# Altium PCB PCB1.PcbDoc
Units mm, origin at the board's own origin, x right, y up, seen from the top; angles counter-clockwise.
Board outline 60 x 90 mm, 2 copper layers (Top Layer, Bottom Layer); 26 components, 19 nets, 71 pads, 0 vias.
Unrouted connection lines stored in the file: 49.
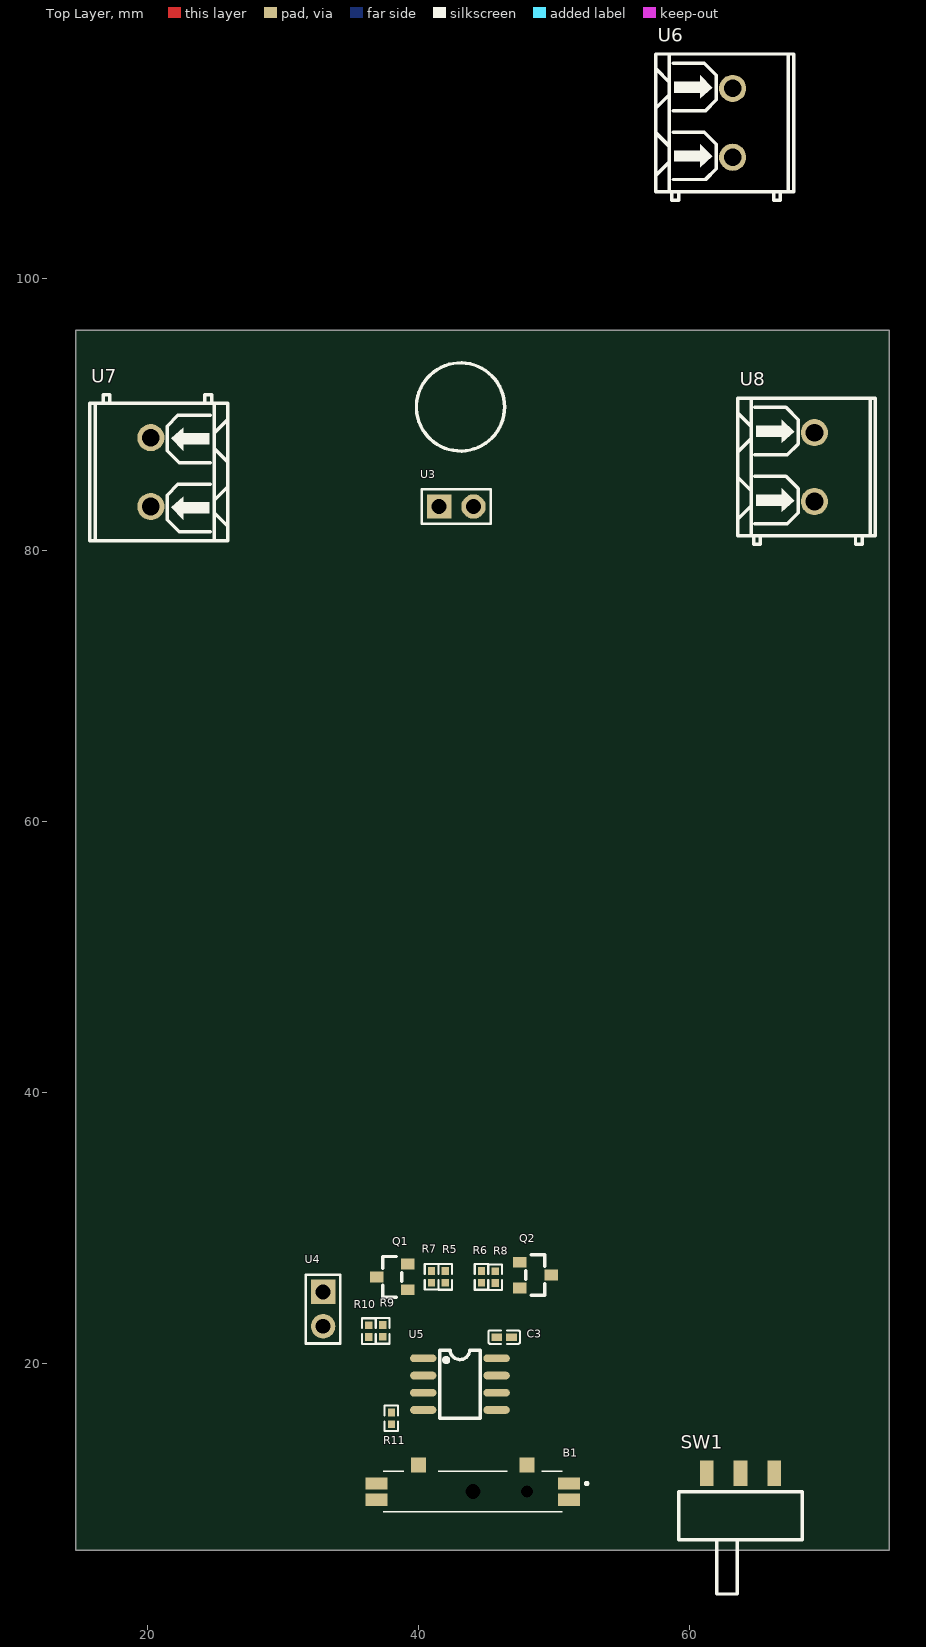
[diagram p0: Top Layer view]
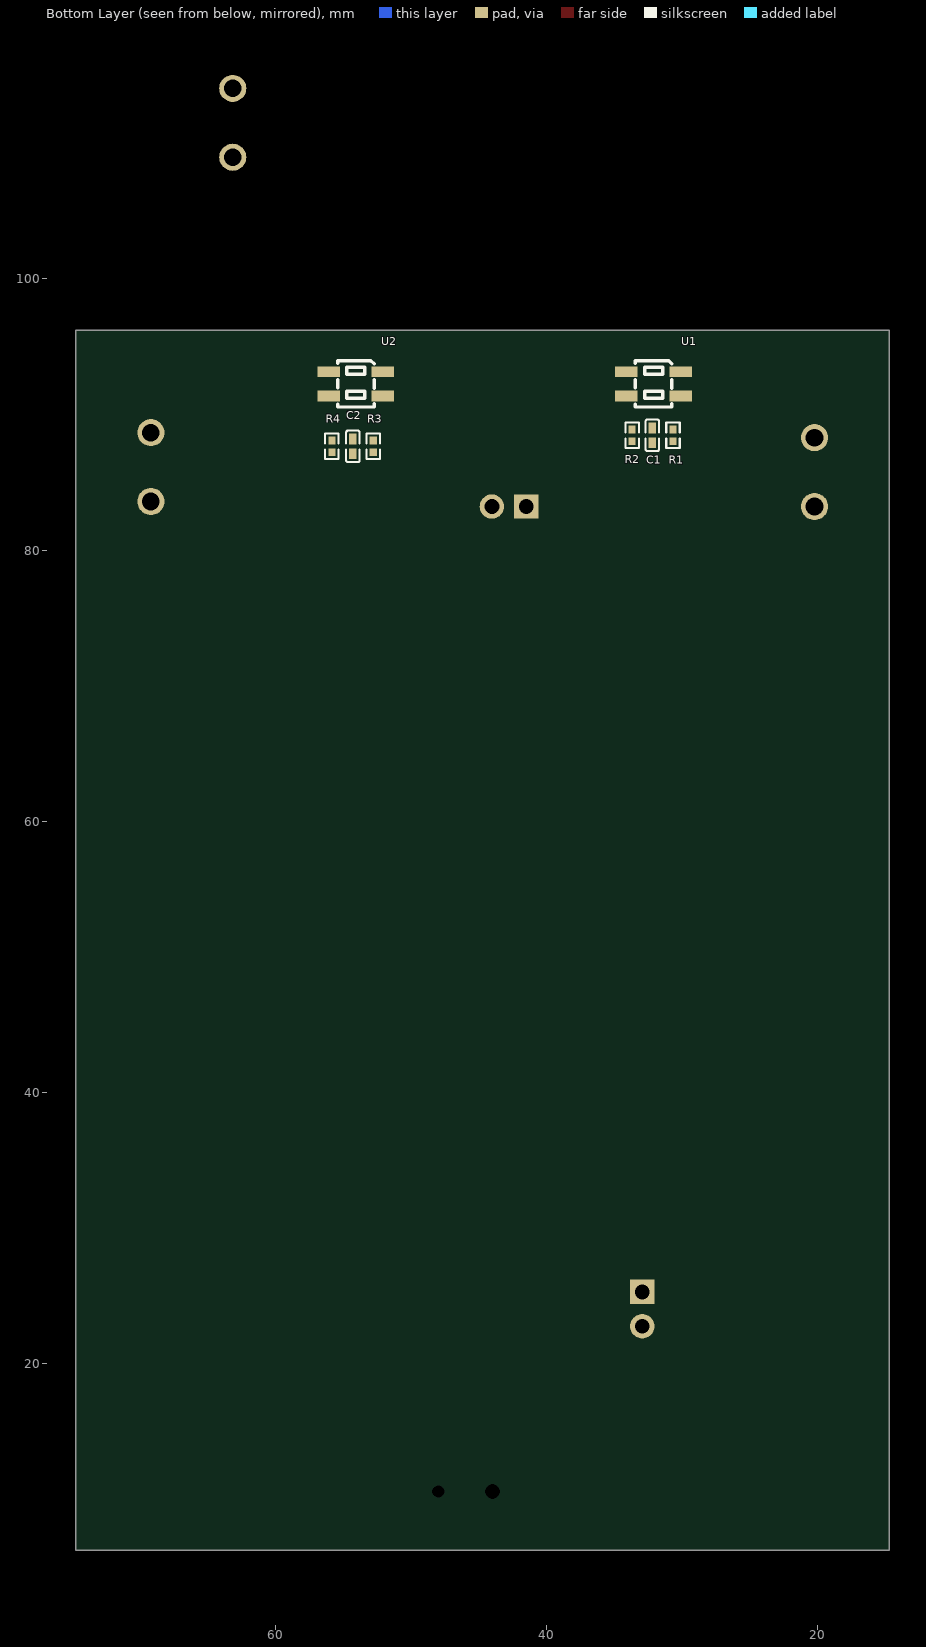
[diagram p1: Bottom Layer view, seen from below]

## Layer stack, top to bottom
Top Solder: solder mask 0.0102, Solder Resist, Dk 3.5
Top Layer: signal copper 0.0356
Dielectric 1: dielectric 0.32, FR-4, Dk 4.8
Bottom Layer: signal copper 0.0356
Bottom Solder: solder mask 0.0102, Solder Resist, Dk 3.5

## Board outline
14.732,6.223 14.732,96.223 74.732,96.223 74.732,6.223

## Design rules (kind name [scope] priority, off if disabled: settings)
Clearance [All] p1: gap=0.254 ignorepadtopadclearanceinfootprint=FALSE
PolygonConnect [All] p1: connectstyle=Relief reliefconductorwidth=0.254 reliefentries=4 polygonreliefangle="90 Angle" airgapwidth=0.254
RoutingVias [All] p1: holewidth=0.711 width=1.27 viastyle="Through Hole" minholewidth=0.711 minwidth=1.27 maxholewidth=0.711 maxwidth=1.27
SolderMaskExpansion [All] p1: expansion=0.102 istentingtop=FALSE
SupplyNets "Schematic Supply Nets_1" [InNet('GND')] p1: voltage=0.000
SupplyNets "Schematic Supply Nets" [InNet('VCC')] p2: voltage=0.000
Width [All] p1: maxlimit=0.254 minlimit=0.254 preferedwidth=0.254
30 further rules are at their usual default settings.

## Classes and differential pairs
component class Sensor: C1 C2 R1 R2 R3 R4 U1 U2
component class OpAmp: B1 C3 Q1 Q2 R5 R6 R7 R8 R9 R10 R11 SW1 U5 U6 U7 U8
component class FSM: U3 U4

## Components (designator, comment, footprint, x,y, rotation, side; value= is the part's Value field where it differs from the comment)
B1 "RS08U11AZ001" RS08U11AZ001 44.006,10.541 r180 top
C1 "10nF" C0402 32.216,88.462 r270 bottom
C2 "10nF" C0402 54.307,87.648 r270 bottom
C3 "100nF" C0402 46.318,21.94 r0 top
Q1 "SS8550-Y2" SOT-23_L2.9-W1.3-P1.90-LS2.4-BR 38.057,26.386 r0 top
Q2 "SS8550-Y2" SOT-23_L2.9-W1.3-P1.90-LS2.4-BR 48.625,26.515 r180 top
R1 "100Ω" R0402 30.692,88.462 r270 bottom
R2 "220Ω" R0402 33.713,88.462 r90 bottom
R3 "100Ω" R0402 52.8,87.648 r270 bottom
R4 "220Ω" R0402 55.851,87.648 r90 bottom
R5 "3.3kΩ" R0402 41.961,26.379 r270 top
R6 "3.3kΩ" R0402 44.644,26.379 r270 top
R7 "10Ω" R0402 40.959,26.386 r90 top
R8 "10Ω" R0402 45.648,26.362 r270 top
R9 "1kΩ" R0402 37.354,22.396 r270 top
R10 "1kΩ" R0402 36.326,22.386 r270 top
R11 "5.1kΩ" R0402 38.001,15.948 r90 top
SW1 "SK-3245S-L4-A" SW-SMD_SK-3245S-L4-A 63.752,11.888 r0 top
U1 "QRE1113GR" OPTO-SMD_QRE1113GR 32.129,92.253 r0 bottom
U2 "QRE1113GR" OPTO-SMD_QRE1113GR 54.091,92.253 r0 bottom
U3 "HX PZ2.54-1x2P ZZ" HDR-TH_2P-P2.54-V-M-3 42.785,83.208 r0 top
U4 "HX PZ2.54-1x2P ZZ" HDR-TH_2P-P2.54-V-M-3 32.958,24.007 r270 top
U5 "LM393DR" LM393 43.053,18.469 r270 top
U6 "WJ500V-5.08-2P-13-00A" CONN-TH_2P-P5.08-WJ500V-5.08-2P 63.171,111.511 r270 top
U7 "WJ500V-5.08-2P-13-00A" CONN-TH_2P-P5.08-WJ500V-5.08-2P 20.252,85.748 r90 top
U8 "WJ500V-5.08-2P-13-00A" CONN-TH_2P-P5.08-WJ500V-5.08-2P 69.205,86.12 r270 top

## Footprints (in the part's own frame and the unit in brackets; to place one, negate y for a bottom-side part, rotate by r counter-clockwise, add the part's x,y. Pads: shape width x height; smd on the part's side, far side on the other; paste and mask are expansions set on the pad)
C0402 [mm]
  rect 0.79x0.54 smd paste-100 mask+0.051: 1(-0.545,0) 2(0.545,0)
  silkscreen extent -1.17,-0.5 1.17,0.5, body extent -0.5,-0.25 0.5,0.25, height 0.5
CONN-TH_2P-P5.08-WJ500V-5.08-2P [mm]
  round 2 hole 1.3: 1(-2.54,0) 2(2.54,0)
  silkscreen extent -5.08,-5.66 5.69,4.5, body extent -3.96,-3.7 4,3.7, height 8.57
HDR-TH_2P-P2.54-V-M-3 [mm]
  rect 1.8x1.8 hole 1.1: 1(-1.27,0)
  round 1.8 hole 1.1: 2(1.27,0)
  silkscreen extent -2.54,-1.27 2.54,1.27, body extent -2.55,-1.23 2.53,1.31, height 10.13
LM393 [mil] "SOIC-8_L5.0-W4.0-P1.27-LS6.0-BL"
  oval 22.38x76.78 smd paste+2: 1(-75,-106.5) 2(-25,-106.5) 3(25,-106.5) 4(75,-106.5) 5(75,106.5) 6(25,106.5) 7(-25,106.5) 8(-75,106.5)
  silkscreen extent -98,-59 98,59, body extent -95,-117 94,111, height 49
OPTO-SMD_QRE1113GR [mm]
  rect 1.66x0.8 smd paste+0.051: 1(-2,-0.9) 2(2,-0.9) 3(2,0.9) 4(-2,0.9)
  silkscreen extent -1.35,-1.7 1.35,1.7, body extent -2.61,-2.1 2.39,1.7, height 1.7
R0402 [mm]
  rect 0.566x0.54 smd paste-100 mask+0.051: 1(-0.433,0) 2(0.433,0)
  silkscreen extent -0.94,-0.5 0.94,0.5, body extent -0.49,-0.26 0.51,0.24, height 0.35
RS08U11AZ001 [mm]
  rect 1.6x0.9 smd: D1(7.1,0.6) T1(-7.1,-0.6) T2(-7.1,0.6) T3(7.1,-0.6)
  rect 1.1x1.1 smd: G1(-4,-1.95) G2(4,-1.95)
  round 0.55 hole 1.1 unplated: MH1(0,0)
  round 0.45 hole 0.9 unplated: MH2(-4,0)
  silkscreen extent -8.5,-1.5 6.6,1.5, body extent -7.4,-2 7.4,2.8, height 2.1
SOT-23_L2.9-W1.3-P1.90-LS2.4-BR [mm]
  rect 1x0.8 smd: 1(1.15,-0.95) 2(1.15,0.95) 3(-1.15,0)
  silkscreen extent -0.7,-1.5 0.7,1.5, body extent -1.18,-1.46 1.18,1.46, height 1.12
SW-SMD_SK-3245S-L4-A [mm]
  rect 1x1.9 smd: 1(2.5,0) 2(0,0) 3(-2.5,0)
  silkscreen extent -4.55,-8.9 4.55,-1.35, body extent -4.5,-6.73 4.5,0.77, height 3.48

## Part data
B1: "Slide Potentiometers Vertical type, Travel 8mm, Lever length 1.3mm", Manufacturer_Name="ALPS Electric", Mouser Part Number=688-RS08U11AZ001, Datasheet Link=https://www.alps.com/prod/info/E/PDF/Potentiometer/SlidePotentiometers/RS__1/RS__1.pdf, Geometry.Height=2.1mm, Manufacturer_Part_Number=RS08U11AZ001, Mouser Price/Stock=https://www.mouser.co.uk/ProductDetail/Alps-Alpine/RS08U11AZ001?qs=3cOf6TWd2rbi6KBi5o1XVQ%3D%3D
C1 C2: "50V 10nF X7R ±10% 0402 Ceramic Capacitors ROHS"
C3: "50V 100nF X7R ±10% 0402 Ceramic Capacitors ROHS"
Q1 Q2: "H档200-350 PNP 电流:1.5A 电压:25V 该 PNP 双极晶体管适用于线性和开关应用。此器件采用 SOT-23 封装，适用于低功率表面贴装应用。", Symbol=SS8550-Y2
R1 R3: "100Ω 62.5mW 50V ±100ppm/℃ Thick Film Resistor ±1% 0402 Chip Resistor - Surface Mount ROHS"
R2 R4: "小尺寸、重量轻。降低组装成本,与贴片机匹配。适用于波峰焊和回流焊"
R5 R6: "62.5mW 3.3kΩ 50V ±100ppm/℃ Thick Film Resistor ±1% 0402 Chip Resistor - Surface Mount ROHS"
R7 R8: "10Ω 62.5mW 50V ±200ppm/℃ Thick Film Resistor ±1% 0402 Chip Resistor - Surface Mount ROHS"
R9 R10: "1kΩ 62.5mW 50V ±100ppm/℃ Thick Film Resistor ±1% 0402 Chip Resistor - Surface Mount ROHS"
R11: "5.1kΩ 62.5mW 50V ±100ppm/℃ Thick Film Resistor ±1% 0402 Chip Resistor - Surface Mount ROHS"
SW1: Actuator Color=Black, Current Rating=50mA, JLCPCB Part Class="Extended Part", LCSC Part Name="柄长4mm 卧贴双档 滑动开关", Manufacturer="XKB Connection(中国星坤)", Operating Temperature=-40℃~+85℃, Voltage Rating=12V, Actuator Style="Rectangular column", Add into BOM=yes, Circuit=DPDT, Convert to PCB=yes, Datasheet=https://atta.szlcsc.com/upload/public/pdf/source/20211011/150604CD043E0D261356905071EFEC5D.pdf, Device=SK-3245S-L4-A, Length=9.1mm, Life="10,000 times", Manufacturer Part=SK-3245S-L4-A, Mounting Type="Horizontal attachment", Supplier=LCSC, Supplier Footprint=SMD, Supplier Part=C500049, Switch Height=3.2mm, Symbol=SK-3245S-L4-A, Termination Style=SMDSplicing, Width=3.55mm
U1 U2: "QRE1113 由在塑料矩形盒体中与兼容硅光电晶体管并排封装的 940nm 发射极组成。采用表面贴装和通孔选项。", Symbol=QRE1113GR
U3 U4: Color=Black, Current Rating=3A, JLCPCB Part Class="Extended Part", LCSC Part Name="1x2P 间距:2.54mm 方针 直插", Manufacturer=hanxia(韩下), Operating Temperature=-40℃~+105℃, Voltage Rating (Max)=-, Add into BOM=yes, Circluar Pins/Square Pins="Pin Header", Contact Material=Brass, Contact Plating=Gold, Convert to PCB=yes, Datasheet=https://item.szlcsc.com/datasheet/HX%2520PZ2.54-1x2P%2520ZZ/34444548.html, Device="HX PZ2.54-1x2P ZZ", Insulation Height=2.5mm, Length of End Connection Pin=3mm, Length of Mating Pin=6mm, Manufacturer Part="HX PZ2.54-1x2P ZZ", Mounting Type="Through Hole", Number of Pins=2P, Number of Rows=1, Pin Structure=1x2P, Pitch=2.54mm, Row Spacing=-, Supplier=LCSC, Supplier Footprint=插件,P=2.54mm, Supplier Part=C32713268, Symbol="HX PZ2.54-1X2P ZZ"
U5: "LM393 商业级双通道差分比较器", Symbol=LM393DR
U6 U7 U8: JLCPCB Part Class="Extended Part", LCSC Part Name="直插  P=5.08mm 2P 可拼接 黑色", Manufacturer=KANGNEX(康奈克斯电气), Add into BOM=yes, Convert to PCB=yes, Datasheet=https://atta.szlcsc.com/upload/public/pdf/source/20241106/B65BE8431F64096104C016AC2C83CE18.pdf, Device=WJ500V-5.08-2P-13-00A, Manufacturer Part=WJ500V-5.08-2P-13-00A, Supplier=LCSC, Supplier Footprint=插件,P=5.08mm, Supplier Part=C42377752, Symbol=WJ500V-5.08-2P-13-00A

## Nets (pads, with @x,y where several pads share a name; then routed paths per layer and width w, separated by ;. In a path a pad name is that pad's centre, name@x,y a point inside that pad or via, vN(x,y) a via of type N, cw(c..) or ccw(c..) an arc to the next point about the centre after c; other vN are vias at no path point)
FSM_OUT1: R9.1 U4.1
FSM_OUT2: R10.1 U4.2
GND: B1.G1 B1.G2 B1.T2 B1.T3 C3.2 R11.1 U1.2 U1.4 U2.2 U2.4 U5.4 U6.2 U7.2 U8.2
NetB1_T1: B1.T1 R9.2 U5.2 U5.5
NetC1_1: C1.1 R2.2 U1.3
NetC2_1: C2.1 R4.2 U2.3
NetQ1_1: Q1.1 R5.1 R7.2
NetQ1_2: Q1.2 U7.1
NetQ2_1: Q2.1 R6.1 R8.2
NetQ2_2: Q2.2 U8.1
NetR1_1: R1.1 U1.1
NetR3_1: R3.1 U2.1
NetR7_1: R7.1 U5.1
NetR8_1: R8.1 U5.7
NetR10_2: R10.2 R11.2 U5.3 U5.6
NetSW1_2: SW1.2 SW1.3 U6.1
S1_OUT: R2.1 U3.1
S2_OUT: R4.1 U3.2
VCC: C1.2 C2.2 C3.1 Q1.3 Q2.3 R1.2 R3.2 R5.2 R6.2 SW1.1 U5.8
pads on no net: B1.D1 B1.MH1 B1.MH2

## Silkscreen, mask and mechanical layers (free items; w line width, h text height)
Top Overlay:
  circle w0.254: c43.099,90.554 r3.253
Mechanical 1:
  lines w0.254: 14.851,6.105 74.851,6.105 74.851,96.105 14.851,96.105 14.851,6.105